# EAGLE board 2400mhz-antenna (EAGLE 9.6.2)
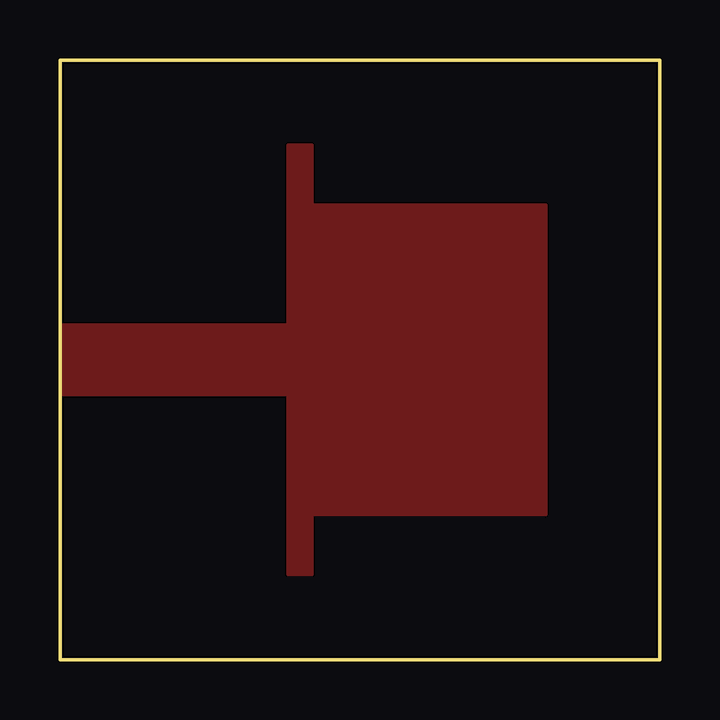
[diagram p0: board, top side]
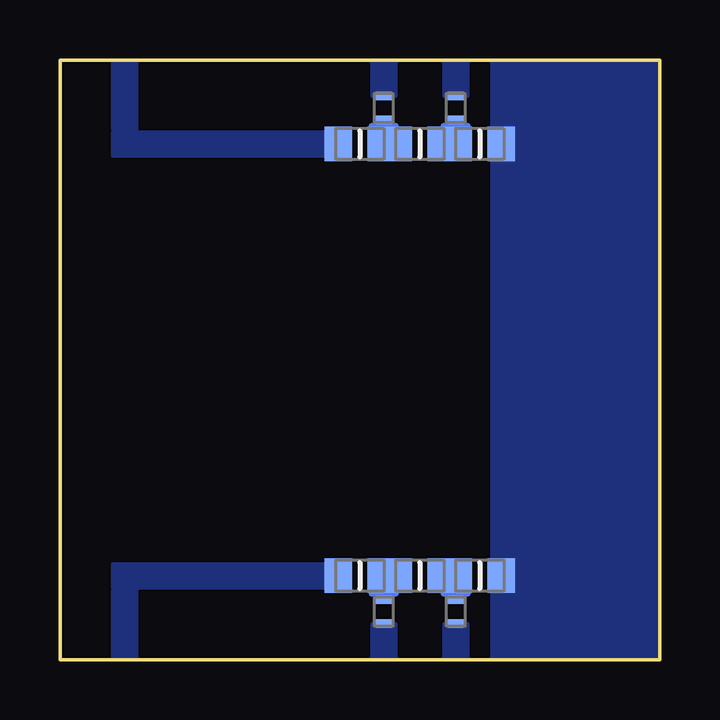
[diagram p1: board, bottom side, seen from below]

Size 25 x 25 mm. Coordinates in mm from the lower left corner, seen from the top.
Outline: 0,0 0,25 25,25 25,0 0,0
Copper layers (1*16): Top 0.035mm / dielectric 1.5mm / Bottom 0.035mm
Design rules "default *": minimum track width 6mil, minimum drill 0.35mm, track to track 0mil, track to pad 0mil, pad to pad 0mil, via to via 0mil, smd to smd 0mil, copper to edge 0mil, drill to drill 6mil, minimum pad ring 10mil, minimum via ring 8mil, stop-mask expansion 4mil, vias tented up to drill 0mil, thermal gap 10mil

## Footprints (pad centres in the part's own frame; a part is rotated, then mirrored left to right if it is on the bottom)
CAPC2012X140N = smd 1.15 x 1.45: 1 -0.9,0; 2 0.9,0
IND_0402HL-821XJRU = smd 0.36 x 0.66: 1 -0.5,0; 2 0.5,0

## Placement (x,y rotation side)
C1  08055K470JBTTR  [CAPC2012X140N]  7.5,3.5 0 bottom
C2  08055K470JBTTR  [CAPC2012X140N]  12.5,3.5 0 bottom
C3  08055K470JBTTR  [CAPC2012X140N]  10,3.5 0 bottom
C4  08055K470JBTTR  [CAPC2012X140N]  7.5,21.5 0 bottom
C5  08055K470JBTTR  [CAPC2012X140N]  12.5,21.5 0 bottom
C6  08055K470JBTTR  [CAPC2012X140N]  10,21.5 0 bottom
L1  0402HPH-R12XGLU  [IND_0402HL-821XJRU]  8.5,2 90 bottom
L2  0402HPH-R12XGLU  [IND_0402HL-821XJRU]  11.5,2 90 bottom
L3  0402HPH-R12XGLU  [IND_0402HL-821XJRU]  11.5,23 270 bottom
L4  0402HPH-R12XGLU  [IND_0402HL-821XJRU]  8.5,23 270 bottom

## Library data of the parts
C1-C6 = 08055K470JBTTR; AVAILABILITY: In Stock; DESCRIPTION: 47 pF Thin Film Capacitor 50 V 0805 (2012 Metric); MF: AVX; MP: 08055K470JBTTR; PACKAGE: 0805 AVX; PRICE: None
L1-L4 = 0402HPH-R12XGLU; AVAILABILITY: In Stock; DESCRIPTION: RF inductor, ceramic core, 2% tol, SMT, RoHS; MF: Coilcraft; MP: 0402HPH-R12XGLU; PACKAGE: 0402 Coilcraft; PRICE: None; PURCHASE-URL: https://pricing.snapeda.com/search/part/0402HPH-R12XGLU/?ref=eda

## Tracks (layer width: path | path; a pad name or v marks a point on that pad's centre or on a via)
CTRL3
  pour Bottom: 8,25 9,25 9,23.5 8,23.5
CTRL4
  pour Bottom: 11,25 12,25 12,23.5 11,23.5
CTRL5
  pour Bottom: 8,1.5 9,1.5 9,0 8,0
CTRL6
  pour Bottom: 11,1.5 12,1.5 12,0 11,0
GROUND3_1
  pour Bottom: 13,3 22.8,3 22.8,4 13,4
GROUND3_2
  pour Bottom: 21.8,2.88 22.8,2.88 22.8,0 21.8,0
GROUND3_11
  pour Bottom: 13,21 22.8,21 22.8,22 13,22
  pour Bottom: 0,25 7,25 7,0 0,0
GROUND3_21
  pour Bottom: 21.8,25 22.8,25 22.8,22.12 21.8,22.12
N$1
  Bottom 0.254: 8,2.75 9,2.75
N$2
  Bottom 0.254: 11,2.75 12,2.75
N$3
  Bottom 0.254: 8,22.25 9,22.25
N$4
  Bottom 0.254: 11,22.25 12,22.25
PATCH1
  pour Top: 0,13.94 0,11.06 9.5,11.06 9.5,13.94
PATCH2
  pour Top: 9.5,21.44 10.5,21.44 10.5,3.56 9.5,3.56
PATCH3
  pour Top: 10.5,6.04 10.5,18.95 20.27,18.95 20.27,6.04